# Altium PCB ROV_Voltage_Switch_1.1.PcbDoc (part 1 of 3)
Units mm, origin at the board's own origin, x right, y up, seen from the top; angles counter-clockwise.
Board outline 250 x 141 mm, 2 copper layers (Top Layer, Bottom Layer); 262 components, 176 nets, 724 pads, 155 vias.
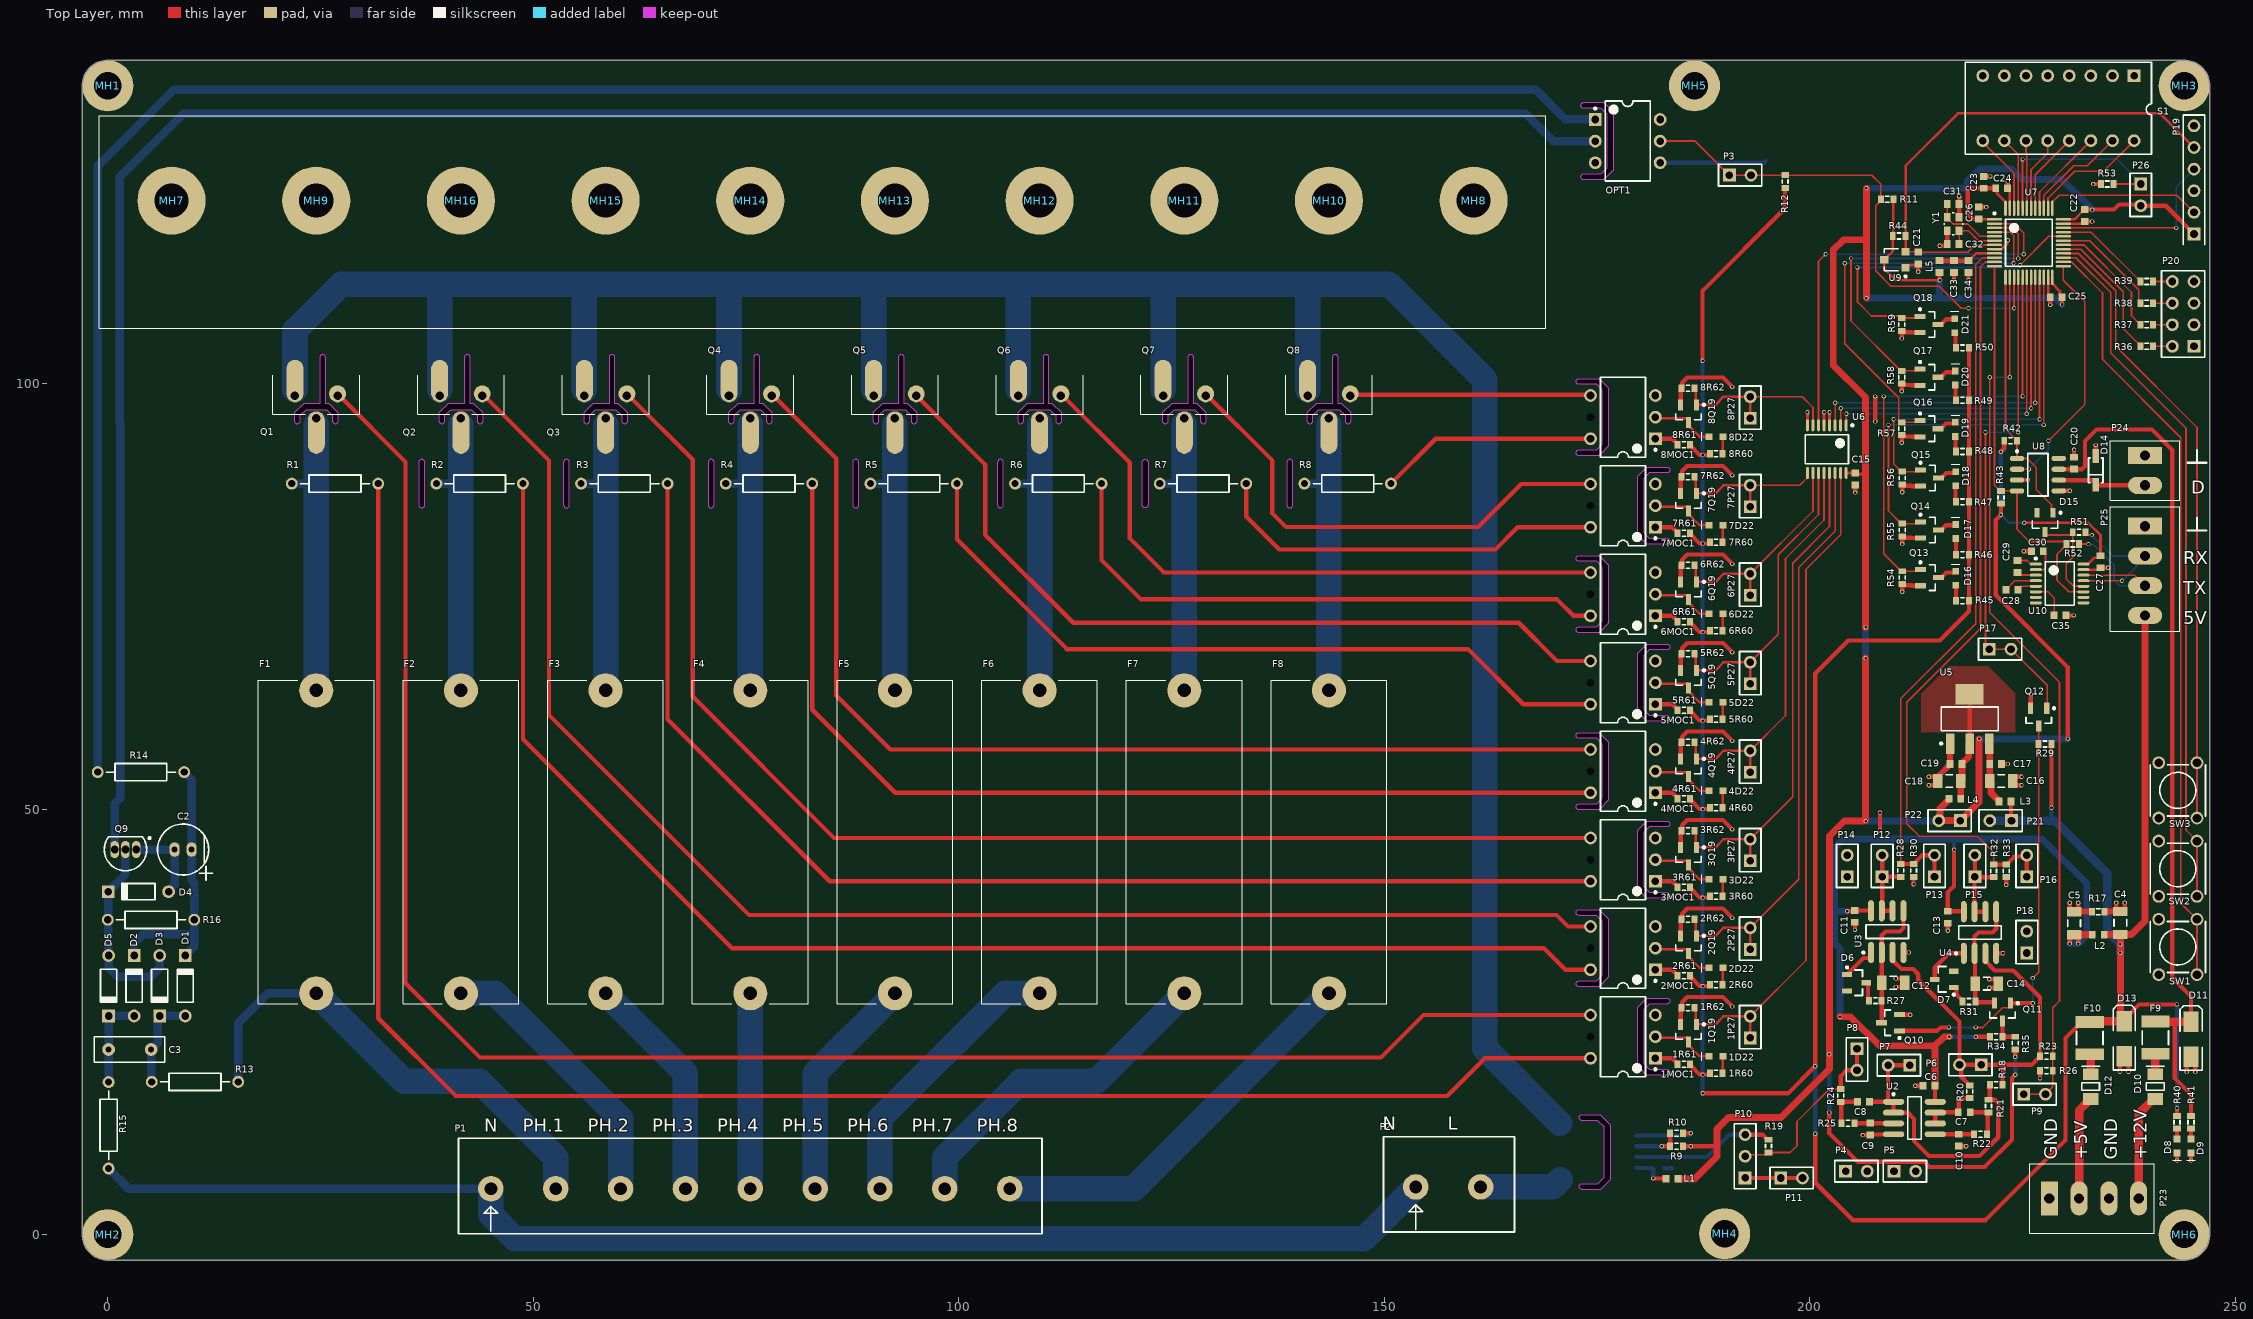
[diagram p0: Top Layer view]
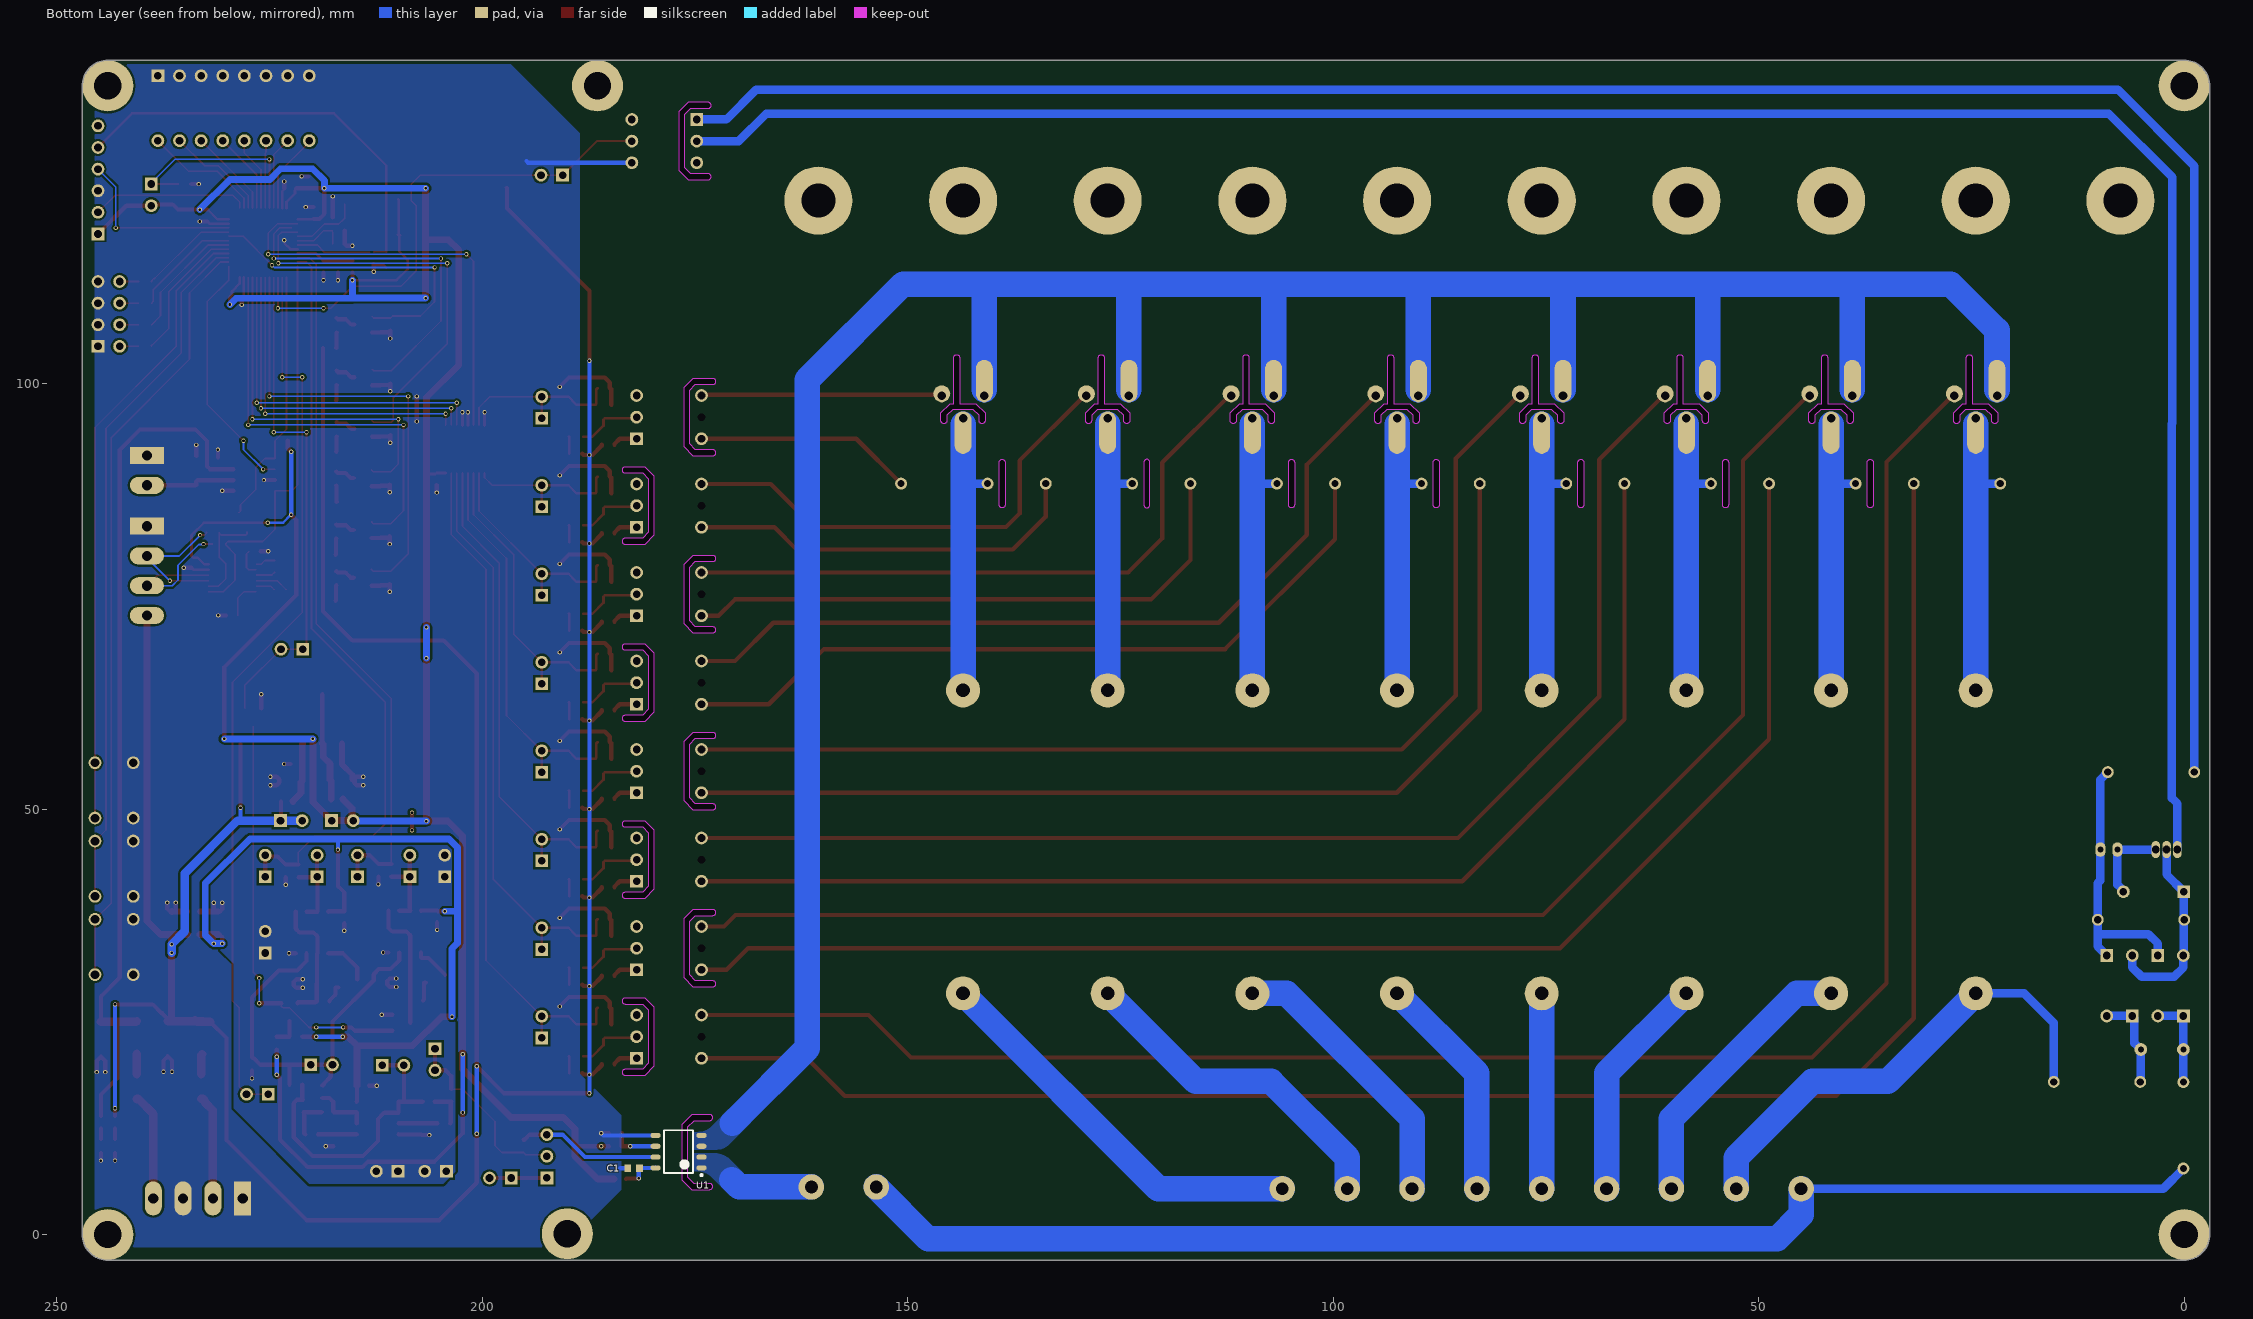
[diagram p1: Bottom Layer view, seen from below]

## Layer stack, top to bottom
Top Solder: solder mask 0.0102, Solder Resist, Dk 3.5
Top Layer: signal copper 0.0356
Dielectric 1: dielectric 0.32, FR-4, Dk 4.8
Bottom Layer: signal copper 0.0356
Bottom Solder: solder mask 0.0102, Solder Resist, Dk 3.5

## Board outline
-3,0 -3,135 cw(c0,135) 0,138 244,138 cw(c244,135) 247,135 247,0 cw(c244,0) 244,-3 0,-3 cw(c0,0)
cut-out: 173.26,5.3 cw(c173.26,5.65) 173.26,6 175.11,6 175.86,6.75 175.86,12.65 175.11,13.4 173.26,13.4 cw(c173.26,13.75) 173.26,14.1 175.4,14.1 176.56,12.94 176.56,6.46 175.4,5.3
cut-out: 138.55,85.75 ccw(c138.9,85.75) 139.25,85.75 139.25,90.75 ccw(c138.9,90.75) 138.55,90.75
cut-out: 121.55,85.75 121.55,90.75 cw(c121.9,90.75) 122.25,90.75 122.25,85.75 cw(c121.9,85.75)
cut-out: 104.55,85.75 ccw(c104.9,85.75) 105.25,85.75 105.25,90.75 ccw(c104.9,90.75) 104.55,90.75
cut-out: 87.55,85.75 ccw(c87.9,85.75) 88.25,85.75 88.25,90.75 ccw(c87.9,90.75) 87.55,90.75
cut-out: 70.55,85.75 ccw(c70.9,85.75) 71.25,85.75 71.25,90.75 ccw(c70.9,90.75) 70.55,90.75
cut-out: 53.55,85.75 ccw(c53.9,85.75) 54.25,85.75 54.25,90.75 ccw(c53.9,90.75) 53.55,90.75
cut-out: 36.55,85.75 ccw(c36.9,85.75) 37.25,85.75 37.25,90.75 ccw(c36.9,90.75) 36.55,90.75
cut-out: 140.91,95.65 ccw(c141.26,95.65) 141.61,95.65 141.61,96.26 142.3,96.95 144.71,96.95 145.4,96.26 145.4,95.65 ccw(c145.75,95.65) 146.1,95.65 146.1,96.55 145,97.65 144.6,97.65 144.6,103.05 ccw(c144.25,103.05) 143.9,103.05 143.9,97.65 142.01,97.65 140.91,96.55
cut-out: 123.91,95.65 ccw(c124.26,95.65) 124.61,95.65 124.61,96.26 125.3,96.95 127.71,96.95 128.4,96.26 128.4,95.65 ccw(c128.75,95.65) 129.1,95.65 129.1,96.55 128,97.65 127.6,97.65 127.6,103.05 ccw(c127.25,103.05) 126.9,103.05 126.9,97.65 125.01,97.65 123.91,96.55
cut-out: 106.91,95.65 ccw(c107.26,95.65) 107.61,95.65 107.61,96.26 108.3,96.95 110.71,96.95 111.4,96.26 111.4,95.65 ccw(c111.75,95.65) 112.1,95.65 112.1,96.55 111,97.65 110.6,97.65 110.6,103.05 ccw(c110.25,103.05) 109.9,103.05 109.9,97.65 108.01,97.65 106.91,96.55
cut-out: 89.91,95.65 ccw(c90.26,95.65) 90.61,95.65 90.61,96.26 91.3,96.95 93.71,96.95 94.4,96.26 94.4,95.65 ccw(c94.75,95.65) 95.1,95.65 95.1,96.55 94,97.65 93.6,97.65 93.6,103.05 ccw(c93.25,103.05) 92.9,103.05 92.9,97.65 91.01,97.65 89.91,96.55
cut-out: 55.91,95.65 ccw(c56.26,95.65) 56.61,95.65 56.61,96.26 57.3,96.95 59.71,96.95 60.4,96.26 60.4,95.65 ccw(c60.75,95.65) 61.1,95.65 61.1,96.55 60,97.65 59.6,97.65 59.6,103.05 ccw(c59.25,103.05) 58.9,103.05 58.9,97.65 57.01,97.65 55.91,96.55
cut-out: 38.91,95.65 ccw(c39.26,95.65) 39.61,95.65 39.61,96.26 40.3,96.95 42.71,96.95 43.4,96.26 43.4,95.65 ccw(c43.75,95.65) 44.1,95.65 44.1,96.55 43,97.65 42.6,97.65 42.6,103.05 ccw(c42.25,103.05) 41.9,103.05 41.9,97.65 40.01,97.65 38.91,96.55
cut-out: 72.91,95.65 ccw(c73.26,95.65) 73.61,95.65 73.61,96.26 74.3,96.95 76.71,96.95 77.4,96.26 77.4,95.65 ccw(c77.75,95.65) 78.1,95.65 78.1,96.55 77,97.65 76.6,97.65 76.6,103.05 ccw(c76.25,103.05) 75.9,103.05 75.9,97.65 74.01,97.65 72.91,96.55
cut-out: 21.91,95.65 ccw(c22.26,95.65) 22.61,95.65 22.61,96.26 23.3,96.95 25.71,96.95 26.4,96.26 26.4,95.65 ccw(c26.75,95.65) 27.1,95.65 27.1,96.55 26,97.65 25.6,97.65 25.6,103.05 ccw(c25.25,103.05) 24.9,103.05 24.9,97.65 23.01,97.65 21.91,96.55
cut-out: 179.76,19.82 179.76,26.7 180.86,27.8 183.2,27.8 cw(c183.2,27.45) 183.2,27.1 181.15,27.1 180.46,26.41 180.46,20.11 181.15,19.42 183.2,19.42 cw(c183.2,19.07) 183.2,18.72 180.86,18.72
cut-out: 172.9,29.12 cw(c172.9,29.47) 172.9,29.82 174.95,29.82 175.64,30.51 175.64,36.81 174.95,37.5 172.9,37.5 cw(c172.9,37.85) 172.9,38.2 175.24,38.2 176.34,37.1 176.34,30.22 175.24,29.12
cut-out: 179.76,40.62 179.76,47.5 180.86,48.6 183.2,48.6 cw(c183.2,48.25) 183.2,47.9 181.15,47.9 180.46,47.21 180.46,40.91 181.15,40.22 183.2,40.22 cw(c183.2,39.87) 183.2,39.52 180.86,39.52
cut-out: 172.9,49.92 cw(c172.9,50.27) 172.9,50.62 174.95,50.62 175.64,51.31 175.64,57.61 174.95,58.3 172.9,58.3 cw(c172.9,58.65) 172.9,59 175.24,59 176.34,57.9 176.34,51.02 175.24,49.92
cut-out: 179.76,61.42 179.76,68.3 180.86,69.4 183.2,69.4 cw(c183.2,69.05) 183.2,68.7 181.15,68.7 180.46,68.01 180.46,61.71 181.15,61.02 183.2,61.02 cw(c183.2,60.67) 183.2,60.32 180.86,60.32
cut-out: 172.9,70.72 cw(c172.9,71.07) 172.9,71.42 174.95,71.42 175.64,72.11 175.64,78.41 174.95,79.1 172.9,79.1 cw(c172.9,79.45) 172.9,79.8 175.24,79.8 176.34,78.7 176.34,71.82 175.24,70.72
cut-out: 179.76,82.22 179.76,89.1 180.86,90.2 183.2,90.2 cw(c183.2,89.85) 183.2,89.5 181.15,89.5 180.46,88.81 180.46,82.51 181.15,81.82 183.2,81.82 cw(c183.2,81.47) 183.2,81.12 180.86,81.12
cut-out: 172.9,91.52 cw(c172.9,91.87) 172.9,92.22 174.95,92.22 175.64,92.91 175.64,99.21 174.95,99.9 172.9,99.9 cw(c172.9,100.25) 172.9,100.6 175.24,100.6 176.34,99.5 176.34,92.62 175.24,91.52
cut-out: 173.45,123.96 cw(c173.45,124.31) 173.45,124.66 175.5,124.66 176.19,125.35 176.19,131.65 175.5,132.34 173.45,132.34 cw(c173.45,132.69) 173.45,133.04 175.79,133.04 176.89,131.94 176.89,125.06 175.79,123.96

## Design rules (kind name [scope] priority, off if disabled: settings)
Clearance Clearance_U1 [OnLayer('Top Layer') vs InNet('+3V3')] p1 off: gap=0.127 ignorepadtopadclearanceinfootprint=TRUE
Clearance Clearance_U1_1 [InNet('NetP2_2') vs InNet('NetQ1_1')] p2: gap=0.127 ignorepadtopadclearanceinfootprint=TRUE
Clearance Clearance_TIRISTORS [(InComponent('Q1') OR InComponent('Q2') OR InComponent('Q3'))] p3: gap=0.127 ignorepadtopadclearanceinfootprint=TRUE
Clearance Clearance_HIGH_VOLTAGE [InNetClass('HIGH_VOLTAGE')] p4: gap=1.5 ignorepadtopadclearanceinfootprint=TRUE except(0.2: Arc-Region Track-Region SMDPad-Region THPad-Region Via-Region Fill-Region Poly-Region Region-Region Region-Hole)
Clearance Clearance_GENERAL [All] p5: gap=0.127 ignorepadtopadclearanceinfootprint=FALSE except(0.254: Arc-Fill Arc-Poly Arc-Region Track-Fill Track-Poly Track-Region SMDPad-Fill SMDPad-Poly SMDPad-Region THPad-Fill THPad-Poly THPad-Region Via-Fill Via-Poly Via-Region Fill-Fill Fill-Poly Fill-Region Poly-Poly Poly-Region Region-Region)
Height [All] p1 off: minheight=0 maxheight=25.4 prefheight=12.7
HoleSize [All] p1: absolutevalues=TRUE maxlimit=6 minlimit=0.025 maxpercent=80.000 minpercent=20.000
MinimumSolderMaskSliver [All] p1: minsoldermaskwidth=0.06
PasteMaskExpansion [All] p1: expansion=0.1
PolygonConnect [All] p1: connectstyle=Direct reliefconductorwidth=0.254 reliefentries=4 polygonreliefangle="90 Angle" airgapwidth=0.254
RoomDefinition MOC_CH_8 [InComponentClass('MOC_CH_8')] p1: confinementstyle=ConfineIn formatcopy=TRUE lockcomponents=FALSE outline 173.1,90.91 194.7,90.91 194.7,101.21 173.1,101.21
RoomDefinition MOC_CH_7 [InComponentClass('MOC_CH_7')] p2: confinementstyle=ConfineIn formatcopy=TRUE lockcomponents=FALSE outline 173.1,80.51 194.7,80.51 194.7,90.81 173.1,90.81
RoomDefinition MOC_CH_6 [InComponentClass('MOC_CH_6')] p3: confinementstyle=ConfineIn formatcopy=TRUE lockcomponents=FALSE outline 173.1,70.11 194.7,70.11 194.7,80.41 173.1,80.41
RoomDefinition MOC_CH_5 [InComponentClass('MOC_CH_5')] p4: confinementstyle=ConfineIn formatcopy=TRUE lockcomponents=FALSE outline 173.1,59.71 194.7,59.71 194.7,70.01 173.1,70.01
RoomDefinition MOC_CH_4 [InComponentClass('MOC_CH_4')] p5: confinementstyle=ConfineIn formatcopy=TRUE lockcomponents=FALSE outline 173.1,49.31 194.7,49.31 194.7,59.61 173.1,59.61
RoomDefinition MOC_CH_1 [InComponentClass('MOC_CH_1')] p6: confinementstyle=ConfineIn formatcopy=TRUE lockcomponents=FALSE outline 173.1,18.11 194.7,18.11 194.7,28.41 173.1,28.41
RoomDefinition MOC_CH_3 [InComponentClass('MOC_CH_3')] p7: confinementstyle=ConfineIn formatcopy=TRUE lockcomponents=FALSE outline 173.1,38.91 194.7,38.91 194.7,49.21 173.1,49.21
RoomDefinition MOC_CH_2 [InComponentClass('MOC_CH_2')] p8: confinementstyle=ConfineIn formatcopy=TRUE lockcomponents=FALSE outline 173.1,28.51 194.7,28.51 194.7,38.81 173.1,38.81
RoutingVias [All] p1: holewidth=0.711 width=1.27 viastyle="Through Hole" minholewidth=0.711 minwidth=1.27 maxholewidth=0.711 maxwidth=1.27 useviatemplates=TRUE viatemplateguid#1={8788999D-03F3-4D29-88D4-36BDFF6985CE} viatemplatename#1=v50h30m0mx0
SilkToSilkClearance [All] p1: silktosilkclearance=0.1
SilkToSolderMaskClearance [IsPad] p1: minsilkscreentomaskgap=0.1 clearancetoexposedcopper=TRUE
SolderMaskExpansion [All] p1: expansion=0.06
Width [All] p1: maxlimit=5 minlimit=0.127 preferedwidth=0.2
24 further rules are at their usual default settings.

## Classes and differential pairs
component class Misc_Parts: Misc1 Misc2 Misc3 Misc4 Misc5 Misc6 Misc7 Misc8 Misc9 Misc10 Misc11 Misc12 Misc13 Misc14 Misc15 Misc16 Misc17 Misc18 Misc19 Misc20 Misc21 Misc22 Misc23 Misc24 Misc25 Misc26 Misc27 Misc28 Misc29 Misc30 Misc31 Misc32 Misc33 Misc34 Misc35 Misc36 Misc37 Misc38 Misc39 Misc40
net class CHANEL_CONTROL_[1..8]: CHANEL_CONTROL_1 CHANEL_CONTROL_2 CHANEL_CONTROL_3 CHANEL_CONTROL_4 CHANEL_CONTROL_5 CHANEL_CONTROL_6 CHANEL_CONTROL_7 CHANEL_CONTROL_8
component class MOC_CH_8: 8D22 8MOC1 8P27 8Q19 8R60 8R61 8R62
component class MOC_CH_7: 7D22 7MOC1 7P27 7Q19 7R60 7R61 7R62
component class MOC_CH_6: 6D22 6MOC1 6P27 6Q19 6R60 6R61 6R62
component class MOC_CH_5: 5D22 5MOC1 5P27 5Q19 5R60 5R61 5R62
component class MOC_CH_4: 4D22 4MOC1 4P27 4Q19 4R60 4R61 4R62
channel class [1.1]MOC_Channel: MOC_CH_1 MOC_CH_2 MOC_CH_3 MOC_CH_4 MOC_CH_5 MOC_CH_6 MOC_CH_7 MOC_CH_8
component class MOC_CH_3: 3D22 3MOC1 3P27 3Q19 3R60 3R61 3R62
component class MOC_CH_2: 2D22 2MOC1 2P27 2Q19 2R60 2R61 2R62
component class MOC_CH_1: 1D22 1MOC1 1P27 1Q19 1R60 1R61 1R62
net class HIGH_VOLTAGE: CHANEL_1_AFTER_FUSE CHANEL_1_BEFORE_FUSE CHANEL_2_AFTER_FUSE CHANEL_2_BEFORE_FUSE CHANEL_3_AFTER_FUSE CHANEL_3_BEFORE_FUSE CHANEL_4_AFTER_FUSE CHANEL_4_BEFORE_FUSE CHANEL_5_AFTER_FUSE CHANEL_5_BEFORE_FUSE CHANEL_6_AFTER_FUSE CHANEL_6_BEFORE_FUSE CHANEL_7_AFTER_FUSE CHANEL_7_BEFORE_FUSE CHANEL_8_AFTER_FUSE CHANEL_8_BEFORE_FUSE Net1MOC1_4 Net2MOC1_4 Net3MOC1_4 Net4MOC1_4 Net5MOC1_4 Net6MOC1_4 Net7MOC1_4 Net8MOC1_4 NetC3_1 NetC3_2 NetP2_2 NetQ1_1 NEUTRAL
component class Digital_1: C15 C16 C17 C18 C19 C20 C21 C22 C23 C24 C25 C26 C27 C28 C29 C30 C31 C32 C33 C34 C35 D8 D9 D10 D11 D12 D13 D14 D15 D16 D17 D18 D19 D20 D21 F9 F10 L3 L4 L5 P19 P20 P21 P22 P23 P24 P25 P26 Q13 Q14 Q15 Q16 Q17 Q18 R36 R37 R38 R39 R40 R41 R42 R43 R44 R45 R46 R47 R48 R49 R50 R51 R52 R53 R54 R55 R56 R57 R58 R59 S1 SW1 SW2 SW3 U5 U6 U7 U8 U9 U10 Y1
component class Analog_1: C4 C5 C6 C7 C8 C9 C10 C11 C12 C13 C14 D6 D7 L2 P4 P5 P6 P7 P8 P9 P10 P11 P12 P13 P14 P15 P16 P17 P18 Q10 Q11 Q12 R17 R18 R19 R20 R21 R22 R23 R24 R25 R26 R27 R28 R29 R30 R31 R32 R33 R34 R35 U2 U3 U4
component class Power_1: C1 C2 C3 D1 D2 D3 D4 D5 F1 F2 F3 F4 F5 F6 F7 F8 L1 MH1 MH2 MH3 MH4 MH5 MH6 MH7 MH8 MH9 MH10 MH11 MH12 MH13 MH14 MH15 MH16 OPT1 P1 P2 P3 Q1 Q2 Q3 Q4 Q5 Q6 Q7 Q8 Q9 R1 R2 R3 R4 R5 R6 R7 R8 R9 R10 R11 R12 R13 R14 R15 R16

## Components (designator, comment, footprint, x,y, rotation, side; value= is the part's Value field where it differs from the comment)
1D22 "GREEN 0603 Led" LED0603 189.8,20.96 r180 top (schematic designator D22)
1MOC1 "IL4108" DIP-6#1 178.05,23.26 r180 top (schematic designator MOC1)
1P27 "Header 2" HDR1X2 193,23.12 r90 top (schematic designator P27)
1Q19 "BSS123" SOT23_N 185.75,23.66 r270 top (schematic designator Q19)
1R60 "0603" J1-0603 189,18.96 r180 top value=470R (schematic designator R60)
1R61 "0603" J1-0603 185.2,20.01 r0 top value=430R (schematic designator R61)
1R62 "0603" J1-0603 185.7,26.66 r0 top value=10K (schematic designator R62)
2D22 "GREEN 0603 Led" LED0603 189.8,31.36 r180 top (schematic designator D22)
2MOC1 "IL4108" DIP-6#1 178.05,33.66 r180 top (schematic designator MOC1)
2P27 "Header 2" HDR1X2 193,33.52 r90 top (schematic designator P27)
2Q19 "BSS123" SOT23_N 185.75,34.06 r270 top (schematic designator Q19)
2R60 "0603" J1-0603 189,29.36 r180 top value=470R (schematic designator R60)
2R61 "0603" J1-0603 185.2,30.41 r0 top value=430R (schematic designator R61)
2R62 "0603" J1-0603 185.7,37.06 r0 top value=10K (schematic designator R62)
3D22 "GREEN 0603 Led" LED0603 189.8,41.76 r180 top (schematic designator D22)
3MOC1 "IL4108" DIP-6#1 178.05,44.06 r180 top (schematic designator MOC1)
3P27 "Header 2" HDR1X2 193,43.92 r90 top (schematic designator P27)
3Q19 "BSS123" SOT23_N 185.75,44.46 r270 top (schematic designator Q19)
3R60 "0603" J1-0603 189,39.76 r180 top value=470R (schematic designator R60)
3R61 "0603" J1-0603 185.2,40.81 r0 top value=430R (schematic designator R61)
3R62 "0603" J1-0603 185.7,47.46 r0 top value=10K (schematic designator R62)
4D22 "GREEN 0603 Led" LED0603 189.8,52.16 r180 top (schematic designator D22)
4MOC1 "IL4108" DIP-6#1 178.05,54.46 r180 top (schematic designator MOC1)
4P27 "Header 2" HDR1X2 193,54.32 r90 top (schematic designator P27)
4Q19 "BSS123" SOT23_N 185.75,54.86 r270 top (schematic designator Q19)
4R60 "0603" J1-0603 189,50.16 r180 top value=470R (schematic designator R60)
4R61 "0603" J1-0603 185.2,51.21 r0 top value=430R (schematic designator R61)
4R62 "0603" J1-0603 185.7,57.86 r0 top value=10K (schematic designator R62)
5D22 "GREEN 0603 Led" LED0603 189.8,62.56 r180 top (schematic designator D22)
5MOC1 "IL4108" DIP-6#1 178.05,64.86 r180 top (schematic designator MOC1)
5P27 "Header 2" HDR1X2 193,64.72 r90 top (schematic designator P27)
5Q19 "BSS123" SOT23_N 185.75,65.26 r270 top (schematic designator Q19)
5R60 "0603" J1-0603 189,60.56 r180 top value=470R (schematic designator R60)
5R61 "0603" J1-0603 185.2,61.61 r0 top value=430R (schematic designator R61)
5R62 "0603" J1-0603 185.7,68.26 r0 top value=10K (schematic designator R62)
6D22 "GREEN 0603 Led" LED0603 189.8,72.96 r180 top (schematic designator D22)
6MOC1 "IL4108" DIP-6#1 178.05,75.26 r180 top (schematic designator MOC1)
6P27 "Header 2" HDR1X2 193,75.12 r90 top (schematic designator P27)
6Q19 "BSS123" SOT23_N 185.75,75.66 r270 top (schematic designator Q19)
6R60 "0603" J1-0603 189,70.96 r180 top value=470R (schematic designator R60)
6R61 "0603" J1-0603 185.2,72.01 r0 top value=430R (schematic designator R61)
6R62 "0603" J1-0603 185.7,78.66 r0 top value=10K (schematic designator R62)
7D22 "GREEN 0603 Led" LED0603 189.8,83.36 r180 top (schematic designator D22)
7MOC1 "IL4108" DIP-6#1 178.05,85.66 r180 top locked (schematic designator MOC1)
7P27 "Header 2" HDR1X2 193,85.52 r90 top (schematic designator P27)
7Q19 "BSS123" SOT23_N 185.75,86.06 r270 top (schematic designator Q19)
7R60 "0603" J1-0603 189,81.36 r180 top value=470R (schematic designator R60)
7R61 "0603" J1-0603 185.2,82.41 r0 top value=430R (schematic designator R61)
7R62 "0603" J1-0603 185.7,89.06 r0 top value=10K (schematic designator R62)
8D22 "GREEN 0603 Led" LED0603 189.8,93.76 r180 top (schematic designator D22)
8MOC1 "IL4108" DIP-6#1 178.05,96.06 r180 top locked (schematic designator MOC1)
8P27 "Header 2" HDR1X2 193,95.92 r90 top (schematic designator P27)
8Q19 "BSS123" SOT23_N 185.75,96.46 r270 top (schematic designator Q19)
8R60 "0603" J1-0603 189,91.76 r180 top value=470R (schematic designator R60)
8R61 "0603" J1-0603 185.2,92.81 r0 top value=430R (schematic designator R61)
8R62 "0603" J1-0603 185.7,99.46 r0 top value=10K (schematic designator R62)
C1 "0603" 1608[0603] 182.2,7.8 r180 bottom value=100nF
C2 "Cap Pol2" "WCAP-ATG5 Capacitor" 8.85,45.25 r180 top value=10uF/35V
C3 "0603" "R82 Capacitors" 2.6,21.75 r0 top value=1nF
C4 "1206" C1206 236.5,36.62 r270 top value=10uF/16V
C5 "1206" C1206 231.05,36.6 r270 top value=10uF/16V
C6 "0603" 1608[0603] 214,17.5 r0 top value=100nF
C7 "0603" 1608[0603] 218.15,14.4 r0 top value=N.F.
C8 "0603" 1608[0603] 206.3,15.6 r180 top value=N.F.
C9 "0603" 1608[0603] 207.1,12.4 r270 top value=N.F.
C10 "0603" 1608[0603] 217.5,11.1 r270 top value=N.F.
C11 "0603" 1608[0603] 205.3,37.4 r90 top value=100nF
C12 "0603" C1206 209.8,29.6 r180 top value=470nF/FILM
C13 "0603" 1608[0603] 216.2,37.3 r90 top value=100nF
C14 "0603" C1206 220.8,29.5 r180 top value=470nF/FILM
C15 "0603" 1608[0603] 205.35,88.8 r90 top value=100nF
C16 "1206" C1206 222.486,53.304 r180 top value=10uF/16V
C17 "0603" 1608[0603] 221.836,55.304 r180 top value=100n
C18 "1206" C1206 216.386,53.304 r0 top value=10uF/16V
C19 "0603" 1608[0603] 217.186,55.304 r0 top value=100n
C20 "0603" 1608[0603] 231.05,90.65 r270 top value=100nF
C21 "0603" 1608[0603] 212.75,114.75 r90 top value=N.F.
C22 "0603" 1608[0603] 232.3,119.75 r90 top value=100nF
C23 "0603" 1608[0603] 220.425,123.65 r270 top value=10uF
C24 "0603" 1608[0603] 222.55,122.95 r180 top value=100nF
C25 "0603" 1608[0603] 228.95,110.15 r0 top value=100nF
C26 "0603" 1608[0603] 219.85,120.05 r270 top value=100nF
C27 "0603" 1608[0603] 234.163,79.063 r90 top value=100nF
C28 "0603" 1608[0603] 223.762,75.763 r180 top value=100nF
C29 "0603" 1608[0603] 224.413,78.513 r90 top value=100nF
C30 "0603" 1608[0603] 226.737,80.287 r0 top value=100nF
C31 "0603" 1608[0603] 216.85,121.1 r0 top value=18pF
C32 "0603" 1608[0603] 216.85,116.4 r180 top value=18pF
C33 "0603" 1608[0603] 216.95,113.75 r90 top value=10uF
C34 "0603" 1608[0603] 218.65,113.75 r90 top value=100nF
C35 "0603" 1608[0603] 229.413,72.763 r180 top value=100nF
D1 "Diode 1N4148" DO-35 9.1,29.25 r90 top
D2 "Diode 1N4148" DO-35 3.1,29.25 r90 top
D3 "Diode 1N4148" DO-35 6.1,29.25 r270 top
D4 "Diode 1N4148" DO-35 3.6,40.3 r180 top
D5 "Diode 1N4148" DO-35 0.1,29.25 r270 top
D6 "BAT54" SOT-23_N 205.5,29.6 r0 top
D7 "BAT54" SOT-23_N 215.8,30 r180 top
D8 "GREEN 0603 Led" LED0603 243.15,11.25 r270 top
D9 "GREEN 0603 Led" LED0603 244.8,11.25 r270 top
D10 "SS26FL" SOD123F 240.6,17.4 r90 top
D11 "SMAJ28A-13-F" SMA 244.8,22.95 r90 top
D12 "SS26FL" SOD123F 233,17.4 r90 top
D13 "SMAJ5.0A-13-F" SMA 236.95,23 r90 top
D14 "BZT52C30" SOD123 233.6,89.8 r270 top
D15 "BAT54" SOT-23_N 227.65,83.7 r270 top
D16 "GREEN 0603 Led" LED0603 217.15,76.3 r90 top
D17 "GREEN 0603 Led" LED0603 217.15,81.8 r90 top
D18 "GREEN 0603 Led" LED0603 217.15,88 r90 top
D19 "GREEN 0603 Led" LED0603 217.1,93.8 r90 top
D20 "GREEN 0603 Led" LED0603 217.1,99.85 r90 top
D21 "GREEN 0603 Led" LED0603 217.025,105.975 r90 top
F1 "3AG/3AB (6.3x32mm) Fuse Holder" 03540101ZXGY 24.5,46.15 r90 top
F2 "3AG/3AB (6.3x32mm) Fuse Holder" 03540101ZXGY 41.5,46.15 r90 top
F3 "3AG/3AB (6.3x32mm) Fuse Holder" 03540101ZXGY 58.5,46.15 r90 top
F4 "3AG/3AB (6.3x32mm) Fuse Holder" 03540101ZXGY 75.5,46.15 r90 top
F5 "3AG/3AB (6.3x32mm) Fuse Holder" 03540101ZXGY 92.5,46.15 r90 top
F6 "3AG/3AB (6.3x32mm) Fuse Holder" 03540101ZXGY 109.5,46.15 r90 top
F7 "3AG/3AB (6.3x32mm) Fuse Holder" 03540101ZXGY 126.5,46.15 r90 top
F8 "3AG/3AB (6.3x32mm) Fuse Holder" 03540101ZXGY 143.5,46.15 r90 top
F9 "MF-MSMF110/24X-2" CAPC4532L 240.6,23.15 r90 top
F10 "MF-MSMF110/24X-2" CAPC4532L 232.9,23.1 r90 top
L1 "BLM18AG102SN1D" 1608[0603] 183.8,6.55 r180 top
L2 "BLM18AG102SN1D" 1608[0603] 233.9,35.25 r180 top
L3 "BLM18AG102SN1D" 1608[0603] 222.95,50.9 r180 top
L4 "BLM18AG102SN1D" 1608[0603] 217.05,51.2 r180 top
L5 "BLM18AG102SN1D" 1608[0603] 215.25,113.75 r90 top
MH1 "Mouting Hole" "M3 Mounting Hole"#1 0,135 r180 top
MH2 "Mouting Hole" "M3 Mounting Hole"#1 0,0 r0 top
MH3 "Mouting Hole" "M3 Mounting Hole"#1 244,135 r90 top
MH4 "Mouting Hole" "M3 Mounting Hole"#1 190,0.1 r90 top
MH5 "Mouting Hole" "M3 Mounting Hole"#1 186.45,135 r90 top
MH6 "Mouting Hole" "M3 Mounting Hole"#1 244,0 r0 top
MH7 "Mouting Hole" "M3 Mounting Hole"#2 7.5,121.5 r90 top
MH8 "Mouting Hole" "M3 Mounting Hole"#2 160.5,121.5 r90 top
MH9 "Mouting Hole" "M3 Mounting Hole"#2 24.5,121.5 r0 top
MH10 "Mouting Hole" "M3 Mounting Hole"#2 143.5,121.5 r0 top
MH11 "Mouting Hole" "M3 Mounting Hole"#2 126.5,121.5 r0 top
MH12 "Mouting Hole" "M3 Mounting Hole"#2 109.5,121.5 r0 top
MH13 "Mouting Hole" "M3 Mounting Hole"#2 92.5,121.5 r0 top
MH14 "Mouting Hole" "M3 Mounting Hole"#2 75.5,121.5 r0 top
MH15 "Mouting Hole" "M3 Mounting Hole"#2 58.5,121.5 r0 top
MH16 "Mouting Hole" "M3 Mounting Hole"#2 41.5,121.5 r0 top
OPT1 "4N35" DIP-6#2 178.6,128.5 r0 top
P1 "Header 9" "Phoenix Contact 1732351" 45.02,5.4 r0 top
P2 "Header 2" "Phoenix Contact 1731721" 153.7,5.6 r0 top
P3 "Header 2" HDR1X2 190.55,124.5 r0 top
P4 "Header 2" HDR1X2 204.21,7.45 r0 top
P5 "Header 2" HDR1X2 209.9,7.45 r0 top
P6 "Header 2" HDR1X2 220.14,19.95 r180 top
P7 "Header 2" HDR1X2 211.74,19.9 r180 top
P8 "Header 2" HDR1X2 205.55,21.85 r270 top
P9 "Header 2" HDR1X2 225.15,16.5 r0 top
P10 "Selector Jumper" HDR1X3 192.4,6.67 r90 top
P11 "Current Sim Input" HDR1X2 196.6,6.65 r0 top
P12 "Header 2" HDR1X2 208.5,42.05 r90 top
P13 "Header 2" HDR1X2 214.65,42.05 r90 top
P14 "Header 2" HDR1X2 204.4,42.05 r90 top
P15 "Header 2" HDR1X2 219.4,42.05 r90 top
P16 "Header 2" HDR1X2 225.5,42.05 r90 top
P17 "Header 2" HDR1X2 221.1,68.8 r0 top
P18 "Header 2" HDR1X2 225.5,33.1 r90 top
P19 "Header 6" HDR1X6 245.15,117.59 r90 top
P20 "Header 4X2" HDR2X4 245.15,104.38 r90 top
P21 "Header 2" HDR1X2 223.7,48.65 r180 top
P22 "Header 2" HDR1X2 217.7,48.65 r180 top
P23 "Header 4" 284391-4 228.15,4.25 r0 top
P24 "Header 2" 284391-2 239.4,91.55 r270 top
P25 "Header 4" 284391-4 239.4,83.25 r270 top
P26 "Header 2" HDR1X2 238.89,123.45 r270 top
Q1 "T2035H-6I" "TO-220 +3D" 24.5,95.95 r0 top locked
Q2 "T2035H-6I" "TO-220 +3D" 41.5,95.95 r0 top locked
Q3 "T2035H-6I" "TO-220 +3D" 58.5,95.95 r0 top locked
Q4 "T2035H-6I" "TO-220 +3D" 75.5,95.95 r0 top locked
Q5 "T2035H-6I" "TO-220 +3D" 92.5,95.95 r0 top locked
Q6 "T2035H-6I" "TO-220 +3D" 109.5,95.95 r0 top locked
Q7 "T2035H-6I" "TO-220 +3D" 126.5,95.95 r0 top locked
Q8 "T2035H-6I" "TO-220 +3D" 143.5,95.95 r0 top locked
Q9 "2N3904" TO-92A 2.08,45.25 r90 top
Q10 "DMN24H3D5L" SOT23_N 209.5,24.9 r180 top
Q11 "DMN24H3D5L" SOT23_N 222.65,26.15 r270 top
Q12 "BSS123" SOT23_N 226.9,60.8 r270 top
Q13 "BSS123" SOT23_N 214.05,77.2 r0 top
Q14 "BSS123" SOT23_N 214.05,82.8 r0 top
Q15 "BSS123" SOT23_N 214.05,88.9 r0 top
Q16 "BSS123" SOT23_N 214,94.7 r0 top
Q17 "BSS123" SOT23_N 214,100.75 r0 top
Q18 "BSS123" SOT23_N 214,106.95 r0 top
R1 "Res2" AXIAL-0.4 26.7,88.25 r180 top locked value=360R
R2 "Res2" AXIAL-0.4 43.7,88.25 r180 top locked value=360R
R3 "Res2" AXIAL-0.4 60.7,88.25 r180 top locked value=360R
R4 "Res2" AXIAL-0.4 77.7,88.25 r180 top locked value=360R
R5 "Res2" AXIAL-0.4 94.7,88.25 r180 top locked value=360R
R6 "Res2" AXIAL-0.4 111.7,88.25 r180 top locked value=360R
R7 "Res2" AXIAL-0.4 128.7,88.25 r180 top locked value=360R
R8 "Res2" AXIAL-0.4 145.7,88.25 r180 top locked value=360R
R9 "0603" J1-0603 184.35,10.4 r0 top value=0R
R10 "0603" J1-0603 184.35,11.9 r180 top value=N.F.
R11 "0603" J1-0603 209.1,121.65 r180 top value=N.F.
R12 "0603" J1-0603 197.1,123.75 r90 top value=N.F.
R13 "Res2" AXIAL-0.4 10.25,17.95 r180 top value=220K
R14 "Res2" AXIAL-0.4 3.9,54.35 r0 top value=1K
R15 "Res2" AXIAL-0.4 0.1,12.85 r90 top value=220K
R16 "Res2" AXIAL-0.4 5.08,37 r0 top value=22K
R17 "0603" J1-0603 233.9,37.95 r0 top value=0R
R18 "0603" J1-0603 221.9,17.6 r180 top value=0R
R19 "0603" J1-0603 195.15,10.4 r270 top value=N.F.
R20 "0603" J1-0603 218.8,16.8 r270 top value=N.F.
R21 "0603" J1-0603 221,15.1 r90 top value=N.F.
R22 "0603" J1-0603 220.05,11.8 r0 top value=N.F.
R23 "0603" J1-0603 227.8,20.95 r0 top value=N.F.
R24 "0603" J1-0603 203.65,16.35 r90 top value=0R
R25 "0603" J1-0603 204.5,13.1 r180 top value=0R
R26 "0603" J1-0603 227.8,19.25 r180 top value=N.F.
R27 "0603" J1-0603 207.7,27.5 r180 top value=1K
R28 "0603" J1-0603 210.7,42.8 r90 top value=0R
R29 "0603" J1-0603 227.65,57.65 r0 top value=10K
R30 "0603" J1-0603 212.2,42.8 r270 top value=N.F.
R31 "0603" J1-0603 218.7,27.4 r180 top value=1K
R32 "0603" J1-0603 221.6,42.75 r90 top value=0R
R33 "0603" J1-0603 223.1,42.75 r270 top value=N.F.
R34 "0603" J1-0603 221.9,23.25 r0 top value=N.F.
R35 "0603" J1-0603 224.15,22.5 r270 top value=0R
R36 "0603" J1-0603 239.6,104.38 r0 top value=N.F.
R37 "0603" J1-0603 239.6,106.92 r0 top value=N.F.
R38 "0603" J1-0603 239.6,109.46 r0 top value=N.F.
R39 "0603" J1-0603 239.6,112 r0 top value=N.F.
R40 "0603" J1-0603 243.15,13.2 r90 top value=470R
R41 "0603" J1-0603 244.8,13.2 r90 top value=1K
R42 "0603" J1-0603 223.6,93.3 r180 top value=1K5
R43 "0603" J1-0603 222.46,86.64 r270 top value=1K5
R44 "0603" J1-0603 210.5,117.35 r180 top value=10K
R45 "0603" J1-0603 217.95,74.5 r0 top value=470R
R46 "0603" J1-0603 217.95,79.9 r0 top value=470R
R47 "0603" J1-0603 217.95,86.1 r0 top value=470R
R48 "0603" J1-0603 217.95,92.025 r0 top value=470R
R49 "0603" J1-0603 217.95,98.05 r0 top value=470R
R50 "0603" J1-0603 217.95,104.2 r0 top value=470R
R51 "0603" J1-0603 231.65,82.55 r0 top value=N.F.
R52 "0603" J1-0603 230.9,81.15 r0 top value=N.F.
R53 "0603" J1-0603 234.95,123.45 r180 top value=10K
R54 "0603" J1-0603 210.85,77.2 r90 top value=10K
R55 "0603" J1-0603 210.85,82.8 r90 top value=10K
R56 "0603" J1-0603 210.85,88.9 r90 top value=10K
R57 "0603" J1-0603 210.8,94.7 r90 top value=10K
R58 "0603" J1-0603 210.8,100.75 r90 top value=10K
R59 "0603" J1-0603 210.8,106.95 r90 top value=10K
S1 "SW-DIP8" DIP-16-KEY 238.11,136.17 r180 top
SW1 "Tactile Switch" FSM14JLH 243.25,33.8 r90 top
SW2 "Tactile Switch" FSM14JLH 243.25,43 r90 top
SW3 "Tactile Switch" FSM14JLH 243.25,52.2 r90 top
U1 "ACS722LLCTR-20AB-T" SOIC127P600-8CL 176.93,9.75 r0 bottom
U2 "OPA2325IDR" D008_M 212.3,13.7 r0 top
U3 "OPA2325IDR" D008_M 209.1,35.6 r90 top
U4 "OPA2325IDR" D008_M 220,35.5 r90 top
U5 "LM1117IMP-3.3CT-ND" MP04A_N 218.786,60.604 r90 top
U6 "CD74HC238PWR" TSOP65P640-16AL 202,92.3 r270 top
U7 "STM32F030C6T6TR" LQFP48_N 225.75,116.55 r0 top locked
U8 "MCP2003-E/SN" SOIC127P600-8AL 226.8,89.3 r0 top
U9 "APX803S-31SA-7" RT-3 210,114.55 r90 top
U10 "MAX3232CUE" TSSOP16_L 229.363,76.513 r0 top
Y1 "24Mhz Oscilator" "SMD Crysta 2 x 1.6" 216.85,118.75 r270 top

## Footprints (in the part's own frame and the unit in brackets; to place one, negate y for a bottom-side part, rotate by r counter-clockwise, add the part's x,y. Pads: shape width x height; smd on the part's side, far side on the other; paste and mask are expansions set on the pad)
1608[0603] [mm] "Chip Capacitor, Body 1.6x0.8mm, IPC High Density"
  rect 0.8x0.9 smd: 1(-0.7,0) 2(0.7,0)
  body extent -0.87,-0.48 0.87,0.48, height 1.3
284391-2 [mm]
  rect 2x4 hole 1.2: 1(0,0)
  oval 2x4 hole 1.2: 2(3.5,0)
  silkscreen extent -1.75,-4.1 5.25,4.1, body extent -2.2,-4.1 5.3,4.1, height 12.61
284391-4 [mm]
  rect 2x4 hole 1.2: 1(0,0)
  oval 2x4 hole 1.2: 2(3.5,0) 3(7,0) 4(10.5,0)
  silkscreen extent -2.3,-4.1 12.35,4.1, body extent -2.2,-4.1 12.3,4.1, height 12.61
03540101ZXGY [mm] "3AB/3AG Fuse Holder"
  round 4 hole 1.6: 1(-17.8,0) 2(17.8,0)
  silkscreen extent -19,-6.8 19,6.8, body extent -18.55,-6.4 18.55,6.4, height 14
AXIAL-0.4 [mm] "Axial Device, Thru-Hole; 2 Leads; 0.4 in Pin Spacing"
  round 1.4 hole 0.85: 1(-5.08,0) 2(5.08,0)
  silkscreen extent -4.06,-1.02 4.06,1.02
C1206 [mm] "Chip Capacitor, Body 3.2x1.6mm, IPC High Density"
  rect 1.1x1.7 smd: 1(-1.35,0) 2(1.35,0)
  silkscreen extent -0.4,-0.75 0.4,0.75, body extent -1.7,-0.9 1.7,0.9, height 1.3
CAPC4532L [mm] "Chip Capacitor, Body 4.5x3.2mm, IPC High Density"
  rect 1.4x3.3 smd: 1(-1.9,0) 2(1.9,0)
  silkscreen extent -0.8,-1.55 0.8,1.55, body extent -2.4,-1.7 2.4,1.7, height 1.4
D008_M [mm] "SOIC, 8-Leads, Body 4.9x3.9mm, Pitch 1.27mm, IPC Low Density"
  oval 2.5x0.7 smd: 1(-2.45,1.905) 2(-2.45,0.635) 3(-2.45,-0.635) 4(-2.45,-1.905) 5(2.45,-1.905) 6(2.45,-0.635) 7(2.45,0.635) 8(2.45,1.905)
  silkscreen extent -2.57,-2.5 0.8,2.93, body extent -2,-2.5 2,2.5, height 1.75
DIP-6#1 [mm] "DIP; 6 Leads; Row Spacing 7.62 mm; Pitch 2.54 mm"
  rect 1.5x1.5 hole 0.9: 1(-3.81,2.54)
  round 1.5 hole 0.9: 2(-3.81,0) 3(-3.81,-2.54) 4(3.81,-2.54) 6(3.81,2.54)
  round 0 hole 0.9 unplated: 5(3.81,0)
  silkscreen extent -3.94,-4.7 2.65,4.7, body extent -3.55,-4.7 3.55,4.7, height 5.46
DIP-6#2 [mm] "DIP; 6 Leads; Row Spacing 7.62 mm; Pitch 2.54 mm"
  rect 1.5x1.5 hole 0.9: 1(-3.81,2.54)
  round 1.5 hole 0.9: 2(-3.81,0) 3(-3.81,-2.54) 4(3.81,-2.54) 5(3.81,0) 6(3.81,2.54)
  silkscreen extent -3.93,-4.7 2.65,4.7, body extent -3.55,-4.7 3.55,4.7, height 5.46
DIP-16-KEY [mm] "DIP; 16 Leads; Row Spacing 7.62 mm; Pitch 2.54 mm"
  rect 1.5x1.5 hole 0.9: 1(0,0)
  round 1.5 hole 0.9: 2(2.54,0) 3(5.08,0) 4(7.62,0) 5(10.16,0) 6(12.7,0) 7(15.24,0) 8(17.78,0) 9(17.78,7.62) 10(15.24,7.62) 11(12.7,7.62) 12(10.16,7.62) 13(7.62,7.62) 14(5.08,7.62) 15(2.54,7.62) 16(0,7.62)
  silkscreen extent -2.05,-1.59 19.83,9.2
DO-35 [mm] "Diode, Axial; Body 3.8 x 1.9 mm (LxDia. max), Lead Dia. 0.53 mm (max)"
  round 1.5 hole 0.9: 1(-3.55,0)
  rect 1.5x1.5 hole 0.9: 2(3.55,0)
  silkscreen extent -1.95,-0.95 2.05,0.95
FSM14JLH [mm] "Tactile Switches 6MM HIGH TEMP TACT SWITCH"
  round 1.5 hole 1: 1(-3.25,2.25) 2(3.25,2.25) 3(-3.25,-2.25) 4(3.25,-2.25)
  silkscreen extent -3,-3.25 3,3.25, body extent -3.9,-2.99 3.9,3, height 13
HDR1X2 [mm] "Connector; Header; 2 Position"
  rect 1.5x1.5 hole 0.9: 1(0,0)
  round 1.5 hole 0.9: 2(2.54,0)
  silkscreen extent -1.27,-1.27 3.81,1.27
HDR1X3 [mm] "Connector; Header; 3 Position"
  rect 1.5x1.5 hole 0.9: 1(0,0)
  round 1.5 hole 0.9: 2(2.54,0) 3(5.08,0)
  silkscreen extent -1.27,-1.27 6.35,1.27
HDR1X6 [mm] "Connector; Header; 6 Position"
  rect 1.5x1.5 hole 0.9: 1(0,0)
  round 1.5 hole 0.9: 2(2.54,0) 3(5.08,0) 4(7.62,0) 5(10.16,0) 6(12.7,0)
  silkscreen extent -1.27,-1.27 13.97,1.27
HDR2X4 [mm] "Connector; Header; 4x2 Position"
  rect 1.5x1.5 hole 0.9: 1(0,0)
  round 1.5 hole 0.9: 2(0,2.54) 3(2.54,0) 4(2.54,2.54) 5(5.08,0) 6(5.08,2.54) 7(7.62,0) 8(7.62,2.54)
  silkscreen extent -1.27,-1.27 8.89,3.81
J1-0603 [mm] "Chip Resistor, Body 1.6x0.8mm, IPC High Density"
  rect 0.7x0.9 smd: 1(-0.75,0) 2(0.75,0)
  silkscreen extent -0.2,-0.35 0.2,0.35, body extent -0.85,-0.48 0.85,0.48, height 0.9
LED0603 [mm]
  rect 0.8x0.8 smd: 1(0,0) 2(1.65,0)
  silkscreen extent 2.5,-0.5 2.5,0.5
LQFP48_N [mm] "Thin QFP, 48-Leads, Body 7x7mm, Pitch 0.5mm, IPC Medium Density"
  oval 1.8x0.3 smd: 1(-4.05,2.75) 3(-4.05,1.75) 4(-4.05,1.25) 5(-4.05,0.75) 6(-4.05,0.25) 7(-4.05,-0.25) 8(-4.05,-0.75) 9(-4.05,-1.25) 10(-4.05,-1.75) 11(-4.05,-2.25) 12(-4.05,-2.75) 25(4.05,-2.75) 26(4.05,-2.25) 27(4.05,-1.75) 28(4.05,-1.25) 29(4.05,-0.75) 30(4.05,-0.25) 31(4.05,0.25) 32(4.05,0.75) 33(4.05,1.25) 34(4.05,1.75) 35(4.05,2.25) 36(4.05,2.75)
  oval 1.8x0.3 smd mask+0.076: 2(-4.05,2.25)
  oval 0.3x1.8 smd: 13(-2.75,-4.05) 14(-2.25,-4.05) 15(-1.75,-4.05) 16(-1.25,-4.05) 17(-0.75,-4.05) 18(-0.25,-4.05) 19(0.25,-4.05) 20(0.75,-4.05) 21(1.25,-4.05) 22(1.75,-4.05) 23(2.25,-4.05) 24(2.75,-4.05) 37(2.75,4.05) 38(2.25,4.05) 39(1.75,4.05) 40(1.25,4.05) 41(0.75,4.05) 42(0.25,4.05) 43(-0.25,4.05) 44(-0.75,4.05) 45(-1.25,4.05) 46(-1.75,4.05) 47(-2.25,4.05) 48(-2.75,4.05)
  silkscreen extent -4.17,-2.75 2.75,3.57, body extent -3.5,-3.5 3.5,3.5, height 1.6
"M3 Mounting Hole"#1 [mm]
  round 6 hole 3.2: 1(0,0)
"M3 Mounting Hole"#2 [mm]
  round 8 hole 4: 1(0,0)
MP04A_N [mm] "SOT223, 4-Leads, Body 6.5x3.5mm, Pitch 2.3mm, Lead Span 7mm, IPC Medium Density"
  rect 2.4x1 smd: 1(-2.9,2.3) 2(-2.9,0) 3(-2.9,-2.3)
  rect 2.4x3.3 smd: 4(2.9,0)
  silkscreen extent -3.02,-3.35 1.4,3.47, body extent -1.85,-3.35 1.85,3.35, height 1.8
"Phoenix Contact 1731721" [mm]
  round 3 hole 1.5: 1(0,0) 2(7.62,0)
  silkscreen extent -3.81,-5.3 11.6,5.91, body extent -4.41,-5.5 11.41,5.7, height 18.31
"Phoenix Contact 1732351" [mm]
  round 3 hole 1.5: 1(0,0) 2(7.62,0) 3(15.24,0) 4(22.86,0) 5(30.48,0) 6(38.1,0) 7(45.72,0) 8(53.34,0) 9(60.96,0)
  silkscreen extent -3.81,-5.3 64.77,5.91, body extent -4.41,-5.5 57.13,5.7, height 18.31
"R82 Capacitors" [mm]
  round 1.5 hole 0.7: 1(-2.5,0) 2(2.5,0)
  silkscreen extent -4.2,-1.5 4.1,1.5, body extent -3.6,-1.25 3.6,1.25, height 1.27
RT-3 [mm] "SOT-23; 3 Leads; Body 3.0 x 2.6 mm, inc. leads (LxW max)"
  rect 0.9x0.95 smd: 1(-0.95,-1.25) 2(0.95,-1.25) 3(0,1.25)
  silkscreen extent -2.07,-1.38 1.3,1.25, body extent -1.02,-1.02 1.02,1.14, height 1.2
SMA [mm] "DO-214-AC/SMA; 2 C-Bend Leads; Body 5 x 2.7 mm, inc. leads (LxW)"
  rect 2.4x1.8 smd: 1(-2.05,0) 2(2.05,0)
  silkscreen extent -3.65,-1.3 3.95,1.3, body extent -2.92,-1.02 3.05,1.02, height 3
"SMD Crysta 2 x 1.6" [mm]
  rect 1x0.8 smd: 1(-0.8,-0.7) 2(0.8,-0.7) 3(0.8,0.7) 4(-0.8,0.7)
  silkscreen extent -1.3,-1.05 1.25,1.1, body extent -1,-0.8 1,0.8, height 0.7
SOD123 [mm] "SOD-123; 2 Leads; Body 2.7 x 1.6 mm, (LxW)"
  rect 1.6x0.8 smd: 1(-1.7,0) 2(1.7,0)
  silkscreen extent -1.45,-0.85 1.45,0.85
SOD123F [mm] "Diode Case"
  rect 1.4x1.8 smd: 1(-1.45,0) 2(1.45,0)
  silkscreen extent -0.45,-1.05 2.4,1.05, body extent -1.9,-0.85 1.85,0.85, height 1.2
SOIC127P600-8AL [mm] "SOIC, 8-Leads, Body 4.9x3.9mm, Pitch 1.27mm, IPC High Density"
  oval 1.7x0.6 smd: 1(-2.45,1.905) 2(-2.45,0.635) 3(-2.45,-0.635) 4(-2.45,-1.905) 5(2.45,-1.905) 6(2.45,-0.635) 7(2.45,0.635) 8(2.45,1.905)
  silkscreen extent -2.57,-2.5 1.2,2.88, body extent -2,-2.5 2,2.5, height 2.72
SOIC127P600-8CL [mm] "SOIC, 8-Leads, Body 4.9x3.9mm, Pitch 1.27mm, IPC High Density"
  oval 1.2x0.6 smd: 1(-2.7,1.905) 2(-2.7,0.635) 3(-2.7,-0.635) 4(-2.7,-1.905) 5(2.7,-1.905) 6(2.7,-0.635) 7(2.7,0.635) 8(2.7,1.905)
  silkscreen extent -2.82,-2.5 1.7,2.88, body extent -2,-2.5 2,2.5, height 1.73
SOT23_N [mm] "SOT23, 3-Leads, Body 2.9x1.3mm, Pitch 0.95mm, Lead Span 2.3mm, IPC Medium Density"
  rect 1.3x0.6 smd: 1(-1.05,0.95) 2(-1.05,-0.95) 3(1.05,0)
  silkscreen extent -1.17,-1.5 0.7,1.93, body extent -0.7,-1.5 0.7,1.5, height 1.1
SOT-23_N [mm] "SOT23, 3-Leads, Body 2.9x1.3mm, Pitch 0.95mm, Lead Span 2.5mm, IPC Medium Density"
  rect 1.15x0.6 smd: 1(-1.125,0.95) 2(-1.125,-0.95) 3(1.125,0)
  silkscreen extent -1.25,-1.5 0.7,1.92, body extent -0.7,-1.5 0.7,1.5, height 1.1
TO-92A [mm] "TO, Flat Index; 3 In-Line, Axial Leads; Body Dia. 4.5mm; Leads 0.51 x 0.48 mm (max)"
  oval 2x1 hole 0.9: 1(0,-1.27) 2(0,0) 3(0,1.27)
  silkscreen extent -2.48,-2.96 1.5,2.48, body extent -2.48,-2.5 1.5,2.5, height 6.86
"TO-220 +3D" [mm]
  oval 2x5 hole 1 copper offset 0,1.7: 1(-2.5,2.65)
  oval 2x5 hole 1 copper offset 0,-1.7: 2(0,0)
  round 2 hole 1 copper offset 0,0.2: 3(2.5,2.65)
  silkscreen extent -5.1,0.45 5.1,5.05, body extent -4.95,0.55 4.96,5.05, height 20.5
TSOP65P640-16AL [mm] "TSOP, 16-Leads, Body 5x4.4mm, Pitch 0.65mm, IPC High Density"
  oval 1.4x0.35 smd: 1(-2.8,2.275) 2(-2.8,1.625) 3(-2.8,0.975) 4(-2.8,0.325) 5(-2.8,-0.325) 6(-2.8,-0.975) 7(-2.8,-1.625) 8(-2.8,-2.275) 9(2.8,-2.275) 10(2.8,-1.625) 11(2.8,-0.975) 12(2.8,-0.325) 13(2.8,0.325) 14(2.8,0.975) 15(2.8,1.625) 16(2.8,2.275)
  silkscreen extent -2.92,-2.55 1.7,3.13, body extent -2.25,-2.55 2.25,2.55, height 1.1
TSSOP16_L [mm] "TSOP, 16-Leads, Body 5x4.4mm, Pitch 0.65mm, IPC High Density"
  oval 1.4x0.35 smd mask+0.075: 1(-2.8,2.275) 2(-2.8,1.625) 3(-2.8,0.975) 4(-2.8,0.325) 5(-2.8,-0.325) 6(-2.8,-0.975) 7(-2.8,-1.625) 8(-2.8,-2.275) 9(2.8,-2.275) 10(2.8,-1.625) 11(2.8,-0.975) 12(2.8,-0.325) 13(2.8,0.325) 14(2.8,0.975) 15(2.8,1.625) 16(2.8,2.275)
  silkscreen extent -2.94,-2.55 1.7,3.06, body extent -2.25,-2.55 2.25,2.55, height 1.1
"WCAP-ATG5 Capacitor" [mm]
  oval 1.2x1.7 hole 0.7: 1(-1,0) 2(1,0)
  silkscreen extent -3.5,-3 3,3.6, body extent -2.5,-2.5 2.5,2.5, height 10

## Part data
1D22 2D22 3D22 4D22 5D22 6D22 7D22 8D22 D8 D9 D16 D17 D18 D19 D20 D21: library part LED0, "Typical INFRARED GaAs LED", Manufacturer Name=KINGBRIGHT, Manufacturer Part No.=KPT-1608CGCK, Distributor Link=http://uk.farnell.com/kingbright/kpt-1608cgck/led-green-0603-smd/dp/2099220, LatestRevisionDate=08-Jul-2005, LatestRevisionNote="Mech Layer 1 removed.", Note="We have them in Bulgaria", PackageDescription="LED; 2 Leads", PackageReference=LED-0, Price (per 100 in GBP)=0.09, Published=8-Jun-2000, Publisher="Altium Limited"
1MOC1 2MOC1 3MOC1 4MOC1 5MOC1 6MOC1 7MOC1 8MOC1: library part MOC306x, "Optoisolators Trica Driver Output, With Zero Cross Detect", Manufacturer Name="Vishay Semiconductors", Distributor Link=https://eu.mouser.com/ProductDetail/Vishay-Semiconductors/IL4108?qs=xCMk%252BIHWTZOVWW5ZD8NmWQ==, Manufacturer Part No.=IL4108, Note="Get 10 More"
1P27 2P27 3P27 4P27 5P27 6P27 7P27 8P27 P3 P4 P5 P6 P7 P8 P9 P12 P13 P14 P15 P16 P17 P18 P21 P22 P24 P26: "Header, 2-Pin", LatestRevisionDate=17-Jul-2002, LatestRevisionNote="Re-released for DXP Platform.", Publisher="Altium Limited"
1Q19 2Q19 3Q19 4Q19 5Q19 6Q19 7Q19 8Q19 Q12 Q13 Q14 Q15 Q16 Q17 Q18: "N-channel Enhancement Mode Vertical D-MOSFET", Manufacturer Name="ON Semiconductor", ComponentLink1Description="Manufacturer Link", ComponentLink1URL=http://www.semiconductors.philips.com/, ComponentLink2Description=Datasheet, ComponentLink2URL=http://www.semiconductors.philips.com/acrobat/datasheets/BSS123_3.pdf, DatasheetVersion=Apr-1995, Distributor Link=https://eu.mouser.com/ProductDetail/ON-Semiconductor/BSS123LT1G?qs=sGAEpiMZZMshyDBzk1%2fWizSW%252bwlCH%2fhMYWCTWBfWgg8%3d, LatestRevisionDate=12-Dec-2006, LatestRevisionNote="IPC-7351 Footprint Added.", Manufacturer Part No.=BSS123, Note="We have them in Bulgaria", PackageDescription="3-Pin SOT-23 Package 0.95 mm Pitch, 2.3 mm Lead Span", PackageReference=SOT23, PackageVersion=May-1999, Published=17-Sep-2003, Publisher="Altium Limited"
1R60 1R61 1R62 2R60 2R61 2R62 3R60 3R61 3R62 4R60 4R61 4R62 5R60 5R61 5R62 6R60 6R61 6R62 7R60 7R61 7R62 8R60 8R61 8R62 R9 R10 R11 R12 R17 R18 R19 R20 R21 R22 R23 R24 R25 R26 R27 R28 R29 R30 R31 R32 R33 R34 R35 R36 R37 R38 R39 R40 R41 R42 R43 R44 R45 R46 R47 R48 R49 R50 R51 R52 R53 R54 R55 R56 R57 R58 R59: library part Res2, "Resistor", Case Code (in)=0603, LatestRevisionDate=17-Jul-2002, LatestRevisionNote="Re-released for DXP Platform.", Note="We have them in Bulgaria", PackageDescription="Axial Device, Thru-Hole; 2 Leads; 0.4 in Pin Spacing", PackageReference=AXIAL-0.4, Published=8-Jun-2000, Publisher="Altium Limited"
  1R60 2R60 3R60 4R60 5R60 6R60 7R60 8R60 R40 R45 R46 R47 R48 R49 R50: Distributor Link=https://uk.farnell.com/vishay/crcw0603470rfkea/res-470r-1-0-1w-0603-thick-film/dp/1469815RL
  1R61 2R61 3R61 4R61 5R61 6R61 7R61 8R61: Distributor Link=https://uk.farnell.com/vishay/crcw0603430rfkea/res-430r-1-0-1w-0603-thick-film/dp/2141340
  1R62 2R62 3R62 4R62 5R62 6R62 7R62 8R62 R29 R44 R53 R54 R55 R56 R57 R58 R59: Distributor Link=http://uk.farnell.com/multicomp/mcwr06x1002ftl/res-thick-film-10k-1-0-1w-0603/dp/2447230
  R9 R17 R18 R24 R25 R28 R32 R35: Distributor Link=http://uk.farnell.com/yageo/rc0603fr-070rl/res-thick-film-0r-1-0-1w-0603/dp/2309106
  R27 R31 R41: Distributor Link=https://uk.farnell.com/vishay/mct06030c1001fp500/res-1k-1-0-1w-0603-thin-film/dp/2325213
  R42 R43: Distributor Link=https://uk.farnell.com/panasonic/erj3ekf1501v/res-1k5-1-0-1w-0603-thick-film/dp/2303156
C1 C4 C5 C6 C7 C8 C9 C10 C11 C13 C15 C16 C17 C18 C19 C20 C21 C22 C23 C24 C25 C26 C27 C28 C29 C30 C31 C32 C33 C34 C35: library part Cap, "Capacitor", LatestRevisionDate=17-Jul-2002, LatestRevisionNote="Re-released for DXP Platform.", Note="We have them in Bulgaria", PackageDescription="Radial Cap, Thru-Hole; 2 Leads; 0.3 in Pin Spacing", PackageReference=RAD-0.3, Published=8-Jun-2000, Publisher="Altium Limited"
  C1 C6 C11 C13 C15 C17 C19 C20 C22 C24 C25 C26 C27 C28 C29 C30 C34 C35: Case Code (in)=0603, Distributor Link=http://uk.farnell.com/kemet/c0603x104k4ractu/cap-mlcc-x7r-100nf-16v-0603/dp/1414027
  C4 C5 C16 C18: Case Code (in)=1206, Distributor Link=http://uk.farnell.com/kemet/c1206c106k4ractu/cap-mlcc-x7r-10uf-16v-1206/dp/1463368
  C7 C8 C9 C10 C21: Case Code (in)=0603
  C23 C33: Case Code (in)=0603, Distributor Link=https://eu.mouser.com/ProductDetail/Taiyo-Yuden/JMK107ABJ106MA-T?qs=sGAEpiMZZMvsSlwiRhF8qtYrDJZp5VWM0KJHW32Kpw4hdLhJsFnoCA%3d%3d
  C31 C32: Case Code (in)=0603, Distributor Link=https://eu.mouser.com/ProductDetail/AVX/06035A180JAT4A?qs=sGAEpiMZZMvsSlwiRhF8qoLJPdUUh17q4jx5a%252bHkpSk%3d
C2: "Polarized Capacitor (Axial)", Manufacturer Name="Wurth Elektronik", Manufacturer Part No.=860010572002, Distributor Link=https://eu.mouser.com/ProductDetail/Wurth-Elektronik/860010572002?qs=sGAEpiMZZMtZ1n0r9vR22emd73sC8nR%2FeIw40At6znBuqpN1zy5iZQ%3D%3D, LatestRevisionDate=17-Jul-2002, LatestRevisionNote="Re-released for DXP Platform.", PackageDescription="Polarized Capacitor; 2 Leads", PackageReference=POLAR0.8, Published=8-Jun-2000, Publisher="Altium Limited"
C3: library part Cap, "Capacitor", Manufacturer Name=Kemet, Manufacturer Part No.=R82EC1100SH50J, Distributor Link=https://eu.mouser.com/ProductDetail/KEMET/R82EC1100SH50J?qs=Jv4FAWB%252B0HZZcejnl%252BmKFw%3D%3D, LatestRevisionDate=17-Jul-2002, LatestRevisionNote="Re-released for DXP Platform.", PackageDescription="Radial Cap, Thru-Hole; 2 Leads; 0.3 in Pin Spacing", PackageReference=RAD-0.3, Published=8-Jun-2000, Publisher="Altium Limited"
C12 C14: library part Cap, "Capacitor", Case Code (in)=1206, Distributor Link=https://eu.mouser.com/ProductDetail/Panasonic/ECP-U1C474MA5?qs=sGAEpiMZZMv1cc3ydrPrF%252BfZ13WJ%2Fr1%2Fb%252But97GYF3A%3D, LatestRevisionDate=17-Jul-2002, LatestRevisionNote="Re-released for DXP Platform.", Note="Get 6 more", PackageDescription="Radial Cap, Thru-Hole; 2 Leads; 0.3 in Pin Spacing", PackageReference=RAD-0.3, Published=8-Jun-2000, Publisher="Altium Limited"
D1 D2 D3 D4 D5: "High Conductance Fast Diode", Manufacturer Name="ON Semiconductor / Fairchild", Manufacturer Part No.=1N4148, Code_JEDEC=DO-204-AH, ComponentLink1Description="Manufacturer Link", ComponentLink1URL=http://www.fairchildsemi.com/, ComponentLink2Description=Datasheet, ComponentLink2URL=http://www.fairchildsemi.com/ds/1N%2F1N4148.pdf, DatasheetVersion=1997, Distributor Link=https://www.mouser.co.uk/ProductDetail/ON-Semiconductor-Fairchild/1N4148?qs=i4Fj9T%2FoRm8RMUhj5DeFQg%3D%3D, LatestRevisionDate=17-Jul-2002, LatestRevisionNote="Re-released for DXP Platform.", PackageDescription="Diode, Axial; Body 3.8 x 1.9 mm (LxDia. max), Lead Dia. 0.53 mm (max)", PackageReference=DO-35, Published=8-Jun-2000, Publisher="Altium Limited"
D6 D7 D15: library part "Diode BAT17", "Silicon RF Schottky Diode for Mixer Applications in the VHF/UHF Range", Manufacturer Name="ON SEMICONDUCTOR", Manufacturer Part No.=BAT54LT1G, ComponentLink1Description="Manufacturer Link", ComponentLink1URL=http://www.infineon.com/, ComponentLink2Description=Datasheet, ComponentLink2URL=http://www.infineon.com/upload/Document/cmc_upload/documents/009/363/bat17series.pdf, DatasheetVersion=Oct-1999, Distributor Link=https://uk.farnell.com/on-semiconductor/bat54lt1g/diode-signal-30v-sot-23/dp/1431113, LatestRevisionDate=29-May-2009, LatestRevisionNote="IPC-7351 Footprint Added.", Note="We have them in Bulgaria", PackageDescription="3-Pin SOT-23 Package 0.95 mm Pitch, 2.5 mm Lead Span", PackageReference=SOT-23, PackageVersion=Sep-2001, Published=21-Mar-2003, Publisher="Altium Limited"
D10 D12: library part "Diode 11DQ03", "Schottky Rectifier", Manufacturer Name="ON Semiconductor / Fairchild", Code_JEDEC=DO-204-AL, ComponentLink1Description="Manufacturer Link", ComponentLink1URL=http://www.irf.com/, ComponentLink2Description=Datasheet, ComponentLink2URL=http://www.irf.com/product-info/datasheets/data/11dq03.pdf, DatasheetVersion=Dec-1997, Distributor Link=https://eu.mouser.com/ProductDetail/ON-Semiconductor-Fairchild/SS26FL?qs=%2fha2pyFadujLdiyCszVoPuNvgYhu%2f%252bxuyuTPMeW7IG4%3d, LatestRevisionDate=17-Jul-2002, LatestRevisionNote="Re-released for DXP Platform.", Manufacturer Part No.=SS26FL, Note="We have them in Bulgaria", PackageDescription="Diode, Axial; Body 5.2 x 2.7 mm (LxDia. max), Lead Dia. 0.86 mm (max)", PackageReference=DO-204AL, Published=8-Jun-2000, Publisher="Altium Limited"
D11 D13: library part "D Zener", "Zener Diode", Manufacturer Name="Diodes Incorporated", LatestRevisionDate=17-Jul-2002, LatestRevisionNote="Re-released for DXP Platform.", Note="We have them in Bulgaria", PackageReference=DIODE-0.7, Price (per 100 in GBP)=0.12, Published=8-Jun-2000, Publisher="Altium Limited"
  D11: Distributor Link=https://eu.mouser.com/ProductDetail/Diodes-Incorporated/SMAJ28A-13-F?qs=gaDBXWSqsDBA900rgyLC7w==, Manufacturer Part No.=SMAJ28A-13-F
  D13: Distributor Link=https://www.digikey.bg/product-detail/en/diodes-incorporated/SMAJ5.0A-13-F/SMAJ5.0A-FDICT-ND/816522, Manufacturer Part No.=SMAJ5.0A-13-F
D14: library part "D Zener", "Zener Diode", Manufacturer Name="Diodes Incorporated", Manufacturer Part No.=BZT52C30-7-F, Distributor Link=https://eu.mouser.com/ProductDetail/Diodes-Incorporated/BZT52C30-7-F?qs=zLeapIUCO8RFisLH9UF7WA%3D%3D, LatestRevisionDate=17-Jul-2002, LatestRevisionNote="Re-released for DXP Platform.", PackageDescription="Diode, Thru-Hole; 2 Leads; 0.7 in Pin Spacing", PackageReference=DIODE-0.7, Published=8-Jun-2000, Publisher="Altium Limited"
F1 F2 F3 F4 F5 F6 F7 F8: library part "Fuse 1", "Fuse", Manufacturer Name=Littelfuse, Manufacturer Part No.=03540101ZXGY, Distributor Link=https://eu.mouser.com/ProductDetail/Littelfuse/03540101ZXGY?qs=gu7KAQ731USHq53hZeD4aA%3D%3D, LatestRevisionDate=17-Jul-2002, LatestRevisionNote="Re-released for DXP Platform.", PackageDescription="Thru-Hole; 2 Leads", PackageReference=PIN-W2/E2.8, Published=8-Jun-2000, Publisher="Altium Limited"
F9 F10: library part "Fuse 1", "Fuse", Manufacturer Name=Bourns, Manufacturer Part No.=MF-MSMF050-2, LatestRevisionDate=17-Jul-2002, LatestRevisionNote="Re-released for DXP Platform.", Note="We have them in Bulgaria", PackageReference=PIN-W2/E2.8, Price (per 100 in GBP)=0.08, Published=8-Jun-2000, Publisher="Altium Limited"
L1 L2 L3 L4 L5: library part Inductor, "Inductor", Manufacturer Name=Murata, Distributor Link=https://eu.mouser.com/ProductDetail/Murata-Electronics/BLM18AG102SN1D?qs=%2fha2pyFadui%252bmEFJIul6r5GpWOyARRlB97lxmShlzChqi9G%252bTjWC9w%3d%3d, Manufacturer Part No.=BLM18AG102SN1D, Note="We have them in Bulgaria"
OPT1: "Optocoupler, Phototransistor Output, with Base Connection", Manufacturer Name=VISHAY, Distributor Link=https://uk.farnell.com/vishay/4n35/optocoupler-phototransistor-5000vrms/dp/1328375, Manufacturer Part No.=4N35, Note="Get 3 more"
P1: "Header, 9-Pin", Manufacturer Name=1732351, Manufacturer Part No.="Phoenix Contact", Distributor Link=https://eu.mouser.com/ProductDetail/Phoenix-Contact/1732351?qs=%2Fha2pyFaduil4dlFYt6J%252B%2F5QyjaYJ9xdI09CSKJ9bpIMs31xZuIXQ81zvmcHehum, LatestRevisionDate=17-Jul-2002, LatestRevisionNote="Re-released for DXP Platform.", Publisher="Altium Limited"
P2: "Header, 2-Pin", Manufacturer Name="Phoenix Contact", Manufacturer Part No.=1731721, Distributor Link=https://eu.mouser.com/ProductDetail/Phoenix-Contact/1731721?qs=%2Fha2pyFaduil4dlFYt6J%252B%2F5QyjaYJ9xdhRAFrQgHbZVGofCd7cyriOC2wFklXazU, LatestRevisionDate=17-Jul-2002, LatestRevisionNote="Re-released for DXP Platform.", Publisher="Altium Limited"
P10: library part "Header 3", "Header, 3-Pin", LatestRevisionDate=17-Jul-2002, LatestRevisionNote="Re-released for DXP Platform.", Publisher="Altium Limited"
P11: library part "Header 2", "Header, 2-Pin", LatestRevisionDate=17-Jul-2002, LatestRevisionNote="Re-released for DXP Platform.", Publisher="Altium Limited"
P19: "Header, 6-Pin", LatestRevisionDate=17-Jul-2002, LatestRevisionNote="Re-released for DXP Platform.", Publisher="Altium Limited"
P20: "Header, 4-Pin, Dual row", LatestRevisionDate=17-Jul-2002, LatestRevisionNote="Re-released for DXP Platform.", Publisher="Altium Limited"
P23 P25: "Header, 4-Pin", LatestRevisionDate=17-Jul-2002, LatestRevisionNote="Re-released for DXP Platform.", Publisher="Altium Limited"
Q1 Q2 Q3 Q4 Q5 Q6 Q7 Q8: library part Triac, "Silicon Bidirectional Triode Thyristor", Manufacturer Name=STMicroelectronics, ComponentLink1Description="Manufacturer Link", ComponentLink1URL=http://www.motorola.com/, DatasheetVersion=1999, Distributor Link=https://eu.mouser.com/ProductDetail/STMicroelectronics/T2035H-6I?qs=%2Fha2pyFaduhTzOBoTM%252BH2lIkzhHcz3YMyX%252BQq7FR7LM%3D, LatestRevisionDate=17-Jul-2002, LatestRevisionNote="Re-released for DXP Platform.", Manufacturer Part No.=T2035H-6I, Note="Get 30 more of those.", PackageDescription="TO, Thru-Hole, Vertical, Heatsink Mounted; 3 In-Line Leads; Pitch 2.28 mm", PackageReference=369-03, Published=29-Sep-2000, Publisher="Altium Limited"
Q9: "NPN General Purpose Amplifier", Manufacturer Name=MULTICOMP, ComponentLink1Description="Manufacturer Link", ComponentLink1URL=http://www.fairchildsemi.com/, ComponentLink2Description=Datasheet, ComponentLink2URL=http://www.fairchildsemi.com/ds/2N%2F2N3904.pdf, DatasheetVersion=1997, Distributor Link=https://uk.farnell.com/multicomp/2n3904/transistor-npn-to-92/dp/1574370?st=2N3904, LatestRevisionDate=15-Jan-2003, LatestRevisionNote="PCB Footprint 'BCY-W3/D4.7' replaced", Manufacturer Part No.=2N3904, PackageDescription="TO, Flat Index; 3 In-Line, Axial Leads; Body Dia. 4.5mm; Leads 0.51 x 0.48 mm (max)", PackageReference=TO-92A, PackageVersion=Sep-1998, Published=8-Jun-2000, Publisher="Altium Limited"
Q10 Q11: library part BSS123, "N-channel Enhancement Mode Vertical D-MOSFET", Manufacturer Name="Diodes Incorporated", Manufacturer Part No.=DMN24H3D5L-7, ComponentLink1Description="Manufacturer Link", ComponentLink1URL=http://www.semiconductors.philips.com/, ComponentLink2Description=Datasheet, ComponentLink2URL=http://www.semiconductors.philips.com/acrobat/datasheets/BSS123_3.pdf, DatasheetVersion=Apr-1995, Distributor Link=https://www.digikey.com/product-detail/en/diodes-incorporated/DMN24H3D5L-7/DMN24H3D5L-7DICT-ND/5126865, LatestRevisionDate=12-Dec-2006, LatestRevisionNote="IPC-7351 Footprint Added.", PackageDescription="3-Pin SOT-23 Package 0.95 mm Pitch, 2.3 mm Lead Span", PackageReference=SOT23, PackageVersion=May-1999, Published=17-Sep-2003, Publisher="Altium Limited"